# Altium PCB FPGA_VGA_MegaShield.PcbDoc
Units mil, origin at the board's own origin, x right, y up, seen from the top; angles counter-clockwise.
Board outline 4000 x 2100 mil, 4 copper layers (Top Layer, GND, Power, Bottom Layer), stack 30.634 mil thick; 1 components, 23 nets, 92 pads, 0 vias.
Unrouted connection lines stored in the file: 4.
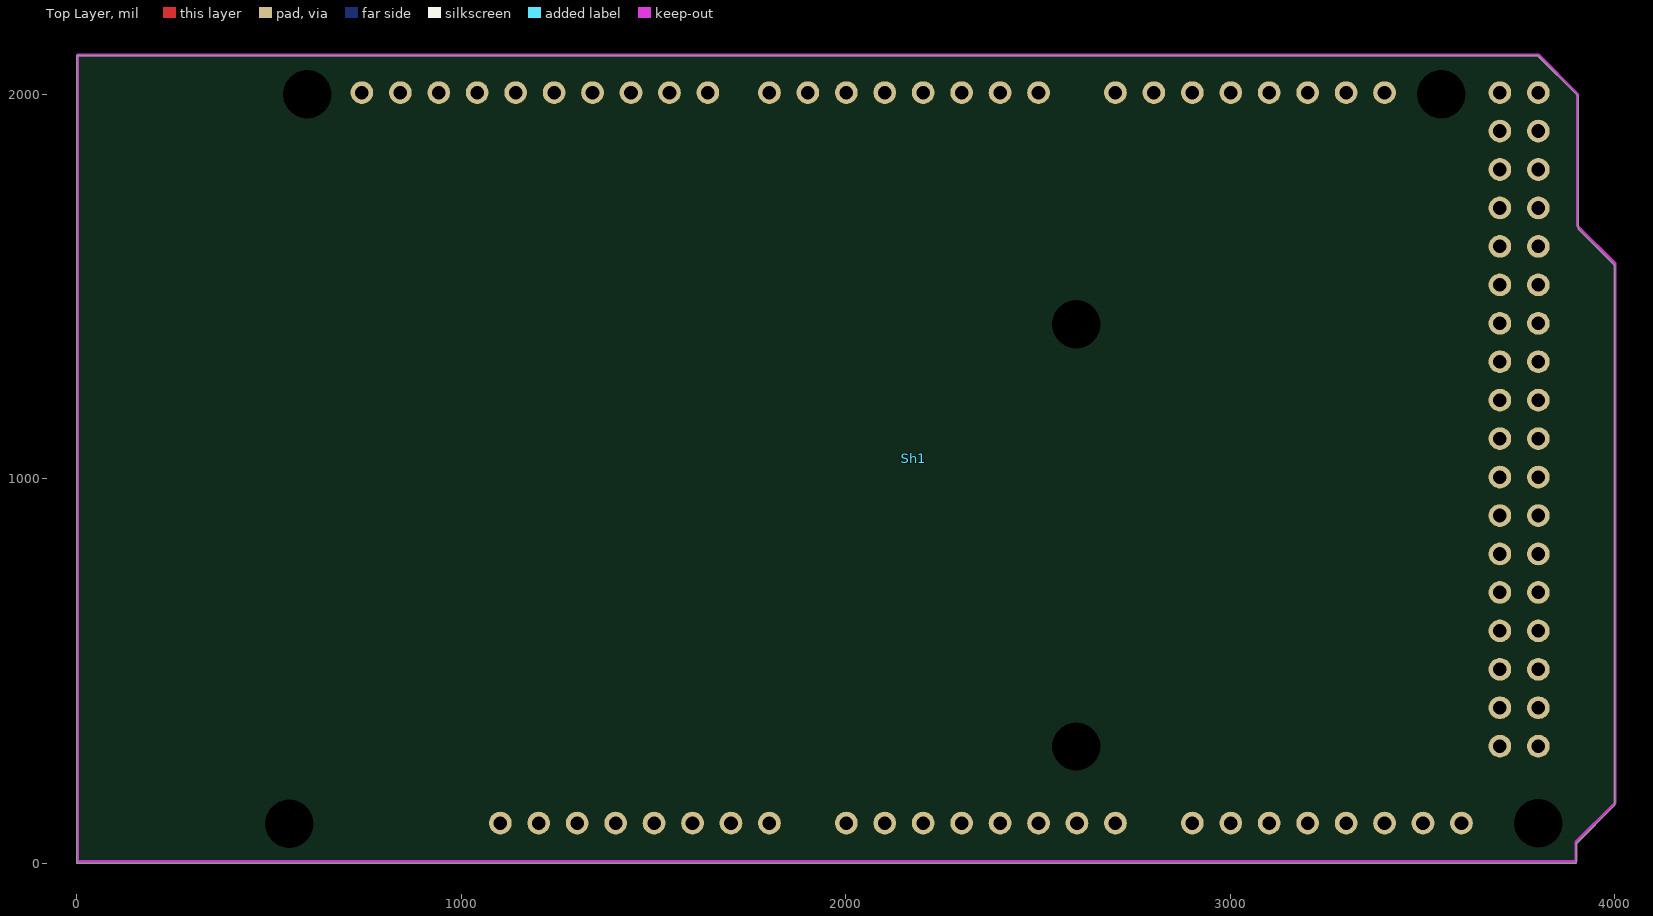
[diagram p0: Top Layer view]
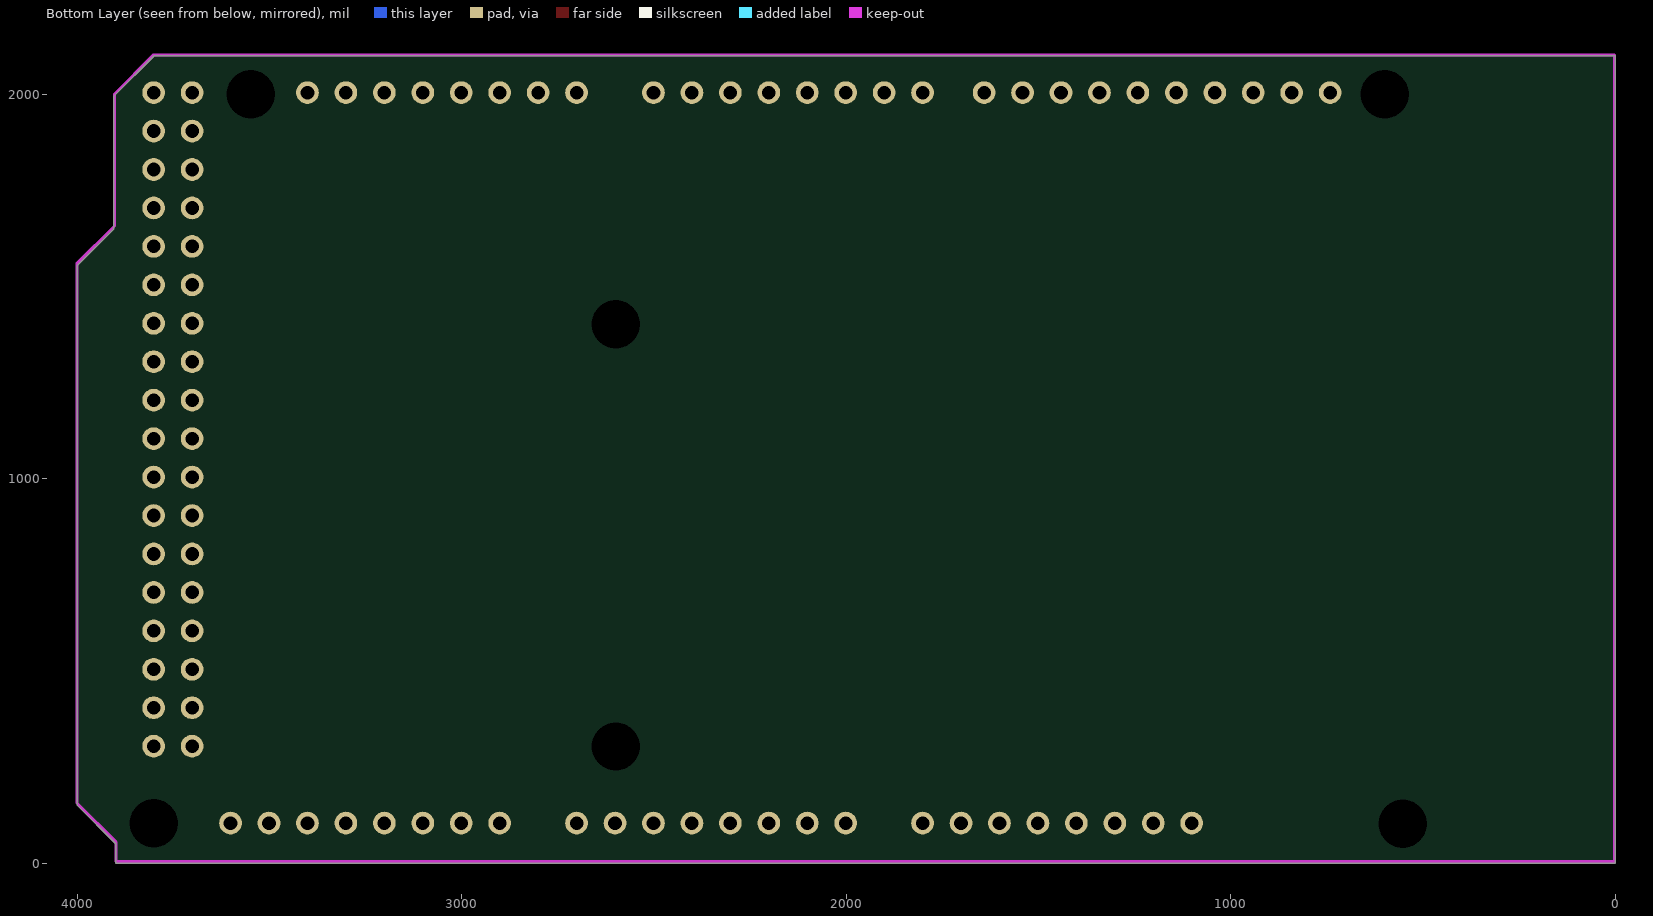
[diagram p1: Bottom Layer view, seen from below]
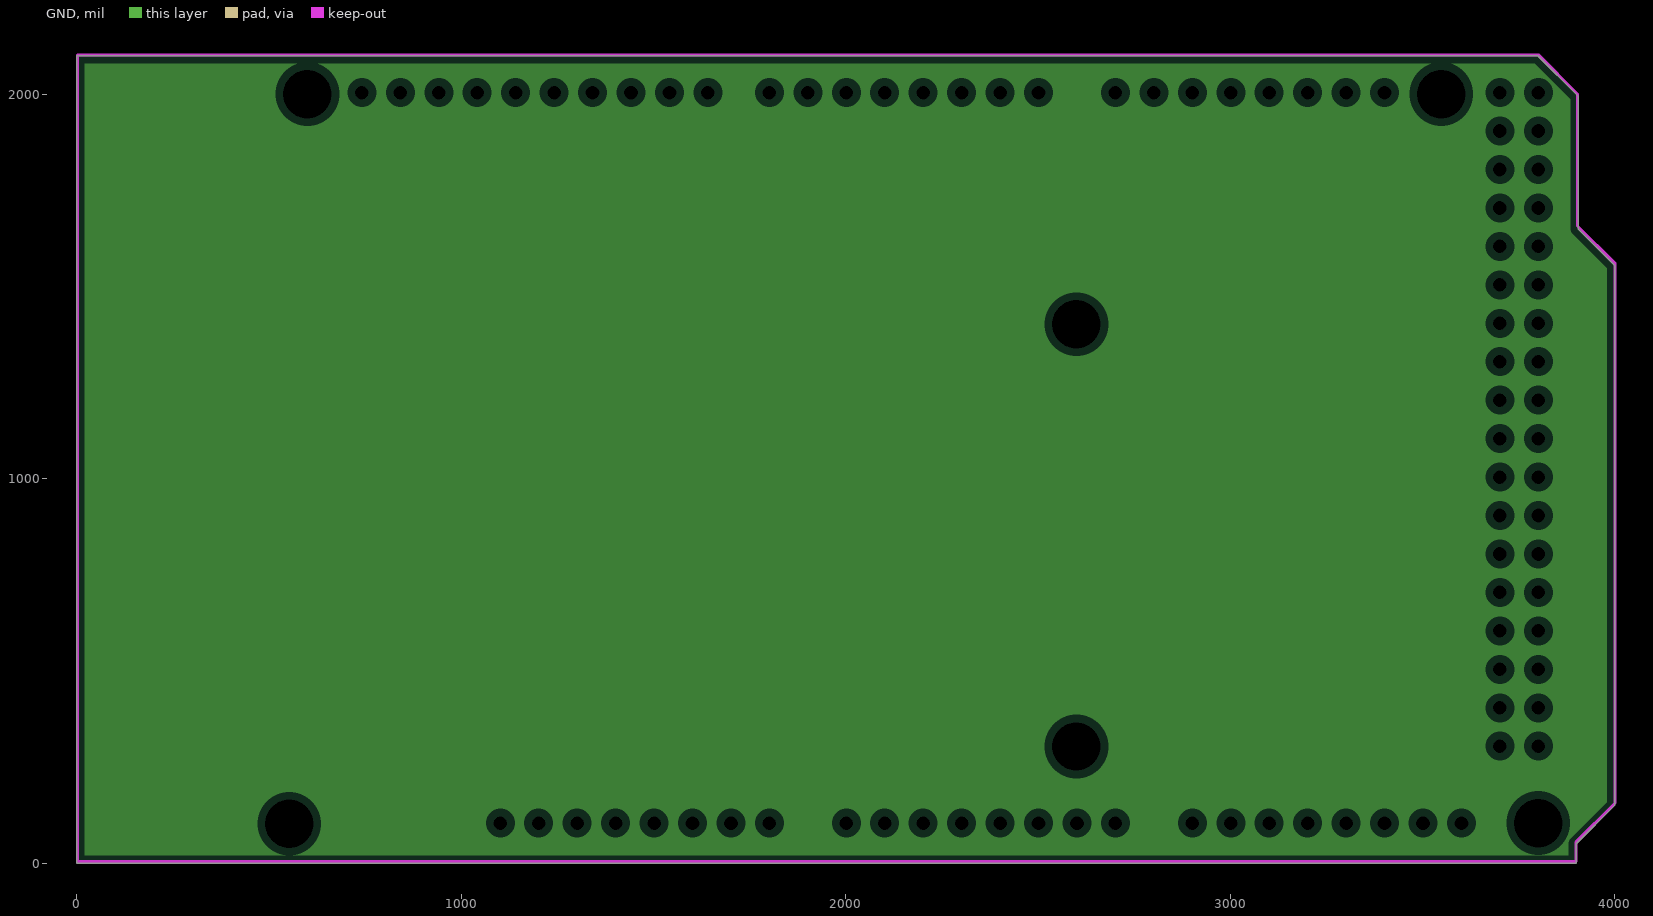
[diagram p2: GND, clearances drawn from the general rule]
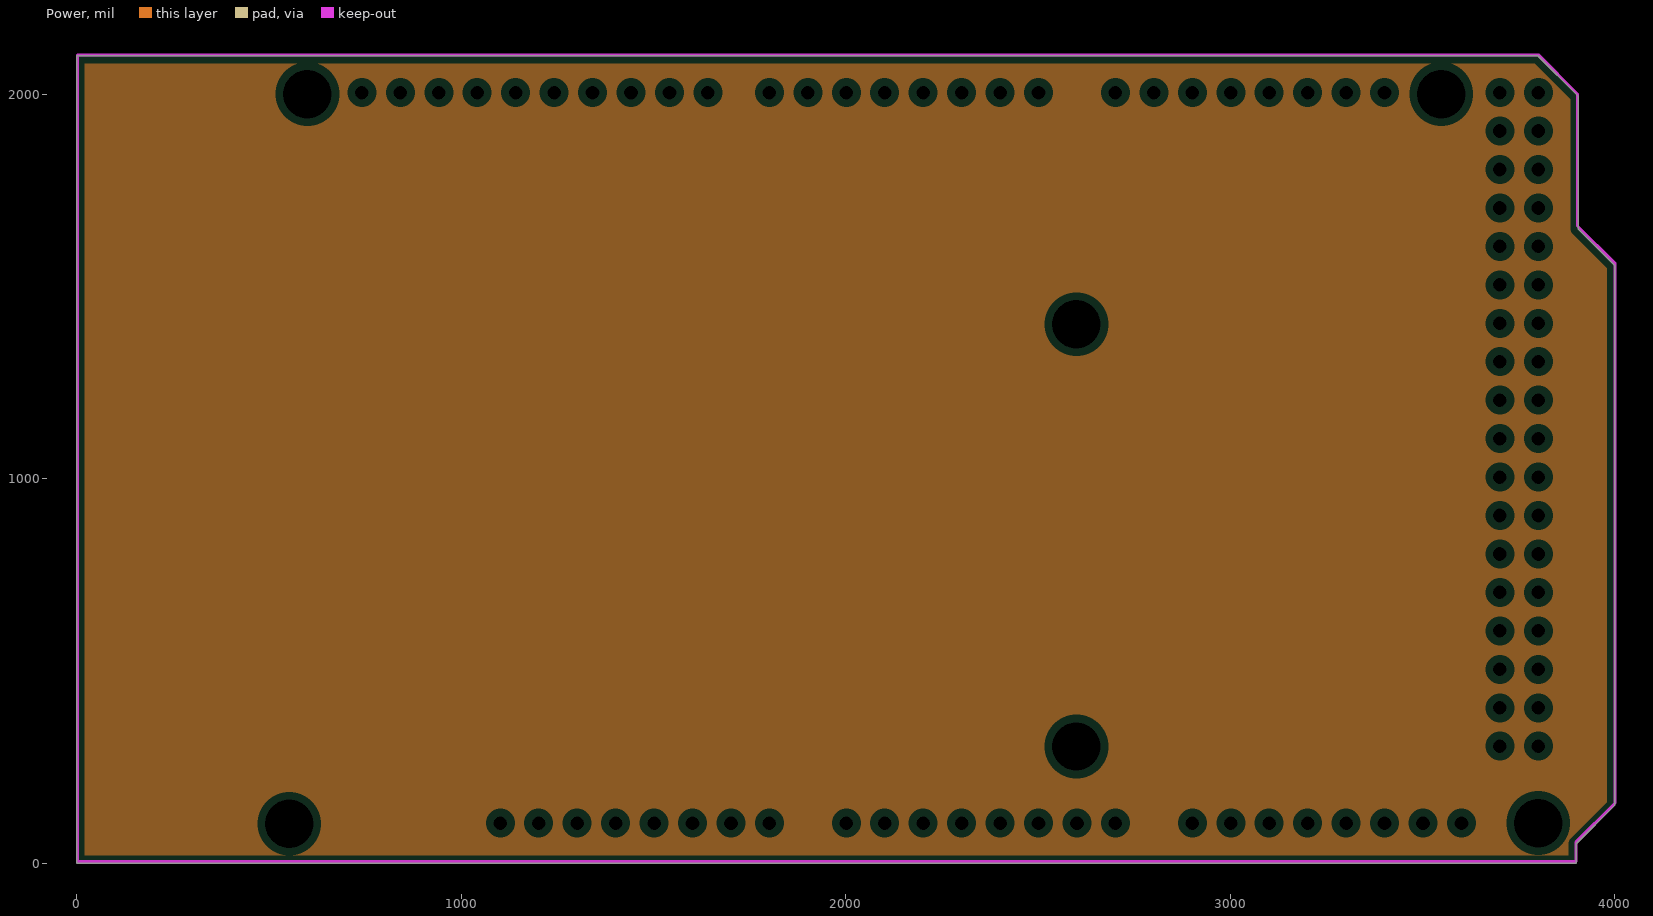
[diagram p3: Power, clearances drawn from the general rule]

## Layer stack, top to bottom
Top Solder: solder mask 0.4, Solder Resist, Dk 3.5
Top Layer: signal copper 1.4
Dielectric 1: core 10, FR-4, Dk 4.2
GND: plane copper 1.417
Dielectric 3: prepreg 5, Dk 4.2
Power: plane copper 1.417
Dielectric 2: core 10, Dk 4.2
Bottom Layer: signal copper 1.4
Bottom Solder: solder mask 0.4, Solder Resist, Dk 3.5

## Board outline
0,0 0,2100 3800,2100 3905,1995 3905,1650 4000,1555 4000,150 3900,50 3900,0

## Design rules (kind name [scope] priority, off if disabled: settings)
Clearance [All] p1: gap=4 ignorepadtopadclearanceinfootprint=FALSE except(0: Arc-Hole Track-Hole SMDPad-Hole THPad-Hole Via-Hole Fill-Hole Poly-Hole Region-Hole Text-Hole; 6: Fill-Fill Fill-Poly Fill-Region Fill-Text Poly-Poly Poly-Region Poly-Text Region-Region Region-Text Text-Text)
HoleSize [All] p1: absolutevalues=TRUE maxlimit=248.03 minlimit=11.81 maxpercent=80.000 minpercent=20.000
MinimumAnnularRing [All] p1: minimumring=5.91
PlaneClearance [All] p1: clearance=20
PlaneConnect [All] p1: planeconnectstyle=Relief reliefexpansion=20 reliefentries=4 reliefconductorwidth=10 reliefairgap=10
PolygonConnect [All] p1: connectstyle=Relief reliefconductorwidth=10 reliefentries=4 polygonreliefangle="90 Angle" airgapwidth=10
RoutingVias [All] p1: holewidth=28 width=50 viastyle="Through Hole" minholewidth=28 minwidth=50 maxholewidth=28 maxwidth=50
SolderMaskExpansion [All] p1: expansion=4
Width [All] p1: maxlimit=100 minlimit=4 preferedwidth=10
27 further rules are at their usual default settings.

## Components (designator, comment, footprint, x,y, rotation, side; value= is the part's Value field where it differs from the comment)
Sh1 "Mega/Due Shield Rev3" "MEGA2560_R3 SHIELD" 1.57,3.94 r0 top locked

## Footprints (in the part's own frame and the unit in brackets; to place one, negate y for a bottom-side part, rotate by r counter-clockwise, add the part's x,y. Pads: shape width x height; smd on the part's side, far side on the other; paste and mask are expansions set on the pad)
"MEGA2560_R3 SHIELD" [mm]
  round 1.5 hole 0.9: 1(27.94,2.54) 2(30.48,2.54) 3(33.02,2.54) 4(35.56,2.54) 5(38.1,2.54) 6(40.64,2.54) 7(43.18,2.54) 8(45.72,2.54) 9(50.8,2.54) 10(53.34,2.54) 11(55.88,2.54) 12(58.42,2.54) 13(60.96,2.54) 14(63.5,2.54) 15(66.04,2.54) 16(68.58,2.54) 17(73.66,2.54) 18(76.2,2.54) 19(78.74,2.54) 20(81.28,2.54) 21(83.82,2.54) 22(86.36,2.54) 23(88.9,2.54) 24(91.44,2.54) 25(21.336,50.8) 25(86.36,50.8) 26(18.796,50.8) 26(83.82,50.8) 27(81.28,50.8) 28(78.74,50.8) 29(76.2,50.8) 30(73.66,50.8) 31(71.12,50.8) 32(68.58,50.8) 33(63.5,50.8) 34(60.96,50.8) 35(58.42,50.8) 36(55.88,50.8) 37(53.34,50.8) 38(50.8,50.8) 39(48.26,50.8) 40(45.72,50.8) 41(41.656,50.8) 42(39.116,50.8) 43(36.576,50.8) 44(34.036,50.8) 45(31.496,50.8) 46(28.956,50.8) 47(26.416,50.8) 48(23.876,50.8) 49(93.98,50.8) 50(96.52,50.8) 51(93.98,48.26) 52(96.52,48.26) 53(93.98,45.72) 54(96.52,45.72) 55(93.98,43.18) 56(96.52,43.18) 57(93.98,40.64) 58(96.52,40.64) 59(93.98,38.1) 60(96.52,38.1) 61(93.98,35.56) 62(96.52,35.56) 63(93.98,33.02) 64(96.52,33.02) 65(93.98,30.48) 66(96.52,30.48) 67(93.98,27.94) 68(96.52,27.94) 69(93.98,25.4) 70(96.52,25.4) 71(93.98,22.86) 72(96.52,22.86) 73(93.98,20.32) 74(96.52,20.32) 75(93.98,17.78) 76(96.52,17.78) 77(93.98,15.24) 78(96.52,15.24) 79(93.98,12.7) 80(96.52,12.7) 81(93.98,10.16) 82(96.52,10.16) 83(93.98,7.62) 84(96.52,7.62)
  round 0 hole 3.2 unplated: ""(14,2.5) ""(15.2,50.7) ""(66,7.6) ""(66,35.5) ""(90.1,50.7) ""(96.52,2.54)
  Keep-Out Layer lines w0.2: 101.591,3.861 99,1.27 99,0 0,0 0,53.3 96.52,53.3 99.111,50.709 99.111,49.86 99.111,41.989 101.6,39.5 101.6,3.861
  body extent 17.78,0 99.06,53.34

## Nets (pads, with @x,y where several pads share a name; then routed paths per layer and width w, separated by ;. In a path a pad name is that pad's centre, name@x,y a point inside that pad or via, vN(x,y) a via of type N, cw(c..) or ccw(c..) an arc to the next point about the centre after c; other vN are vias at no path point)
1.2V: 
3V3: 
C\S\: 
GND: Sh1.6 Sh1.7 Sh1.47 Sh1.83 Sh1.84
MISO: 
MOSI: 
Netb1_1: 
Netb2_1: Sh1.4
Netc6_2: 
NetQ1_3: 
Netr1_1: 
Netr1_2: 
Netr3_2: Sh1.43
Netr4_2: Sh1.44
Netr5_2: Sh1.45
Netr6_2: Sh1.46
Netu2_3: 
Netu2_4: 
Netu2_23: 
Netu2_41: 
Netu2_51: 
Netu2_53: 
SCK: 
pads on no net: Sh1. Sh1.1 Sh1.2 Sh1.3 Sh1.5 Sh1.8 Sh1.9 Sh1.10 Sh1.11 Sh1.12 Sh1.13 Sh1.14 Sh1.15 Sh1.16 Sh1.17 Sh1.18 Sh1.19 Sh1.20 Sh1.21 Sh1.22 Sh1.23 Sh1.24 Sh1.25 Sh1.26 Sh1.27 Sh1.28 Sh1.29 Sh1.30 Sh1.31 Sh1.32 Sh1.33 Sh1.34 Sh1.35 Sh1.36 Sh1.37 Sh1.38 Sh1.39 Sh1.40 Sh1.41 Sh1.42 Sh1.48 Sh1.49 Sh1.50 Sh1.51 Sh1.52 Sh1.53 Sh1.54 Sh1.55 Sh1.56 Sh1.57 Sh1.58 Sh1.59 Sh1.60 Sh1.61 Sh1.62 Sh1.63 Sh1.64 Sh1.65 Sh1.66 Sh1.67 Sh1.68 Sh1.69 Sh1.70 Sh1.71 Sh1.72 Sh1.73 Sh1.74 Sh1.75 Sh1.76 Sh1.77 Sh1.78 Sh1.79 Sh1.80 Sh1.81 Sh1.82

## Polygon pours and split planes (outlines as drawn)
no net on GND (split plane): 3884.9,1986.68 3884.9,1650 3885.29,1646.08 3886.43,1642.31 3888.29,1638.83 3890.79,1635.79 3979.9,1546.68 3979.9,158.32 3885.79,64.21 3883.29,61.17 3881.43,57.69 3880.29,53.92 3879.9,50 3879.9,20.1 20.1,20.1 20.1,2079.9 3791.68,2079.9
no net on Power (split plane): 3884.9,1986.68 3884.9,1650 3885.29,1646.08 3886.43,1642.31 3888.29,1638.83 3890.79,1635.79 3979.9,1546.68 3979.9,158.32 3885.79,64.21 3883.29,61.17 3881.43,57.69 3880.29,53.92 3879.9,50 3879.9,20.1 20.1,20.1 20.1,2079.9 3791.68,2079.9